# EAGLE board SkecthMiniSumo-TB6612FNG - cópia (EAGLE 9.2.2)
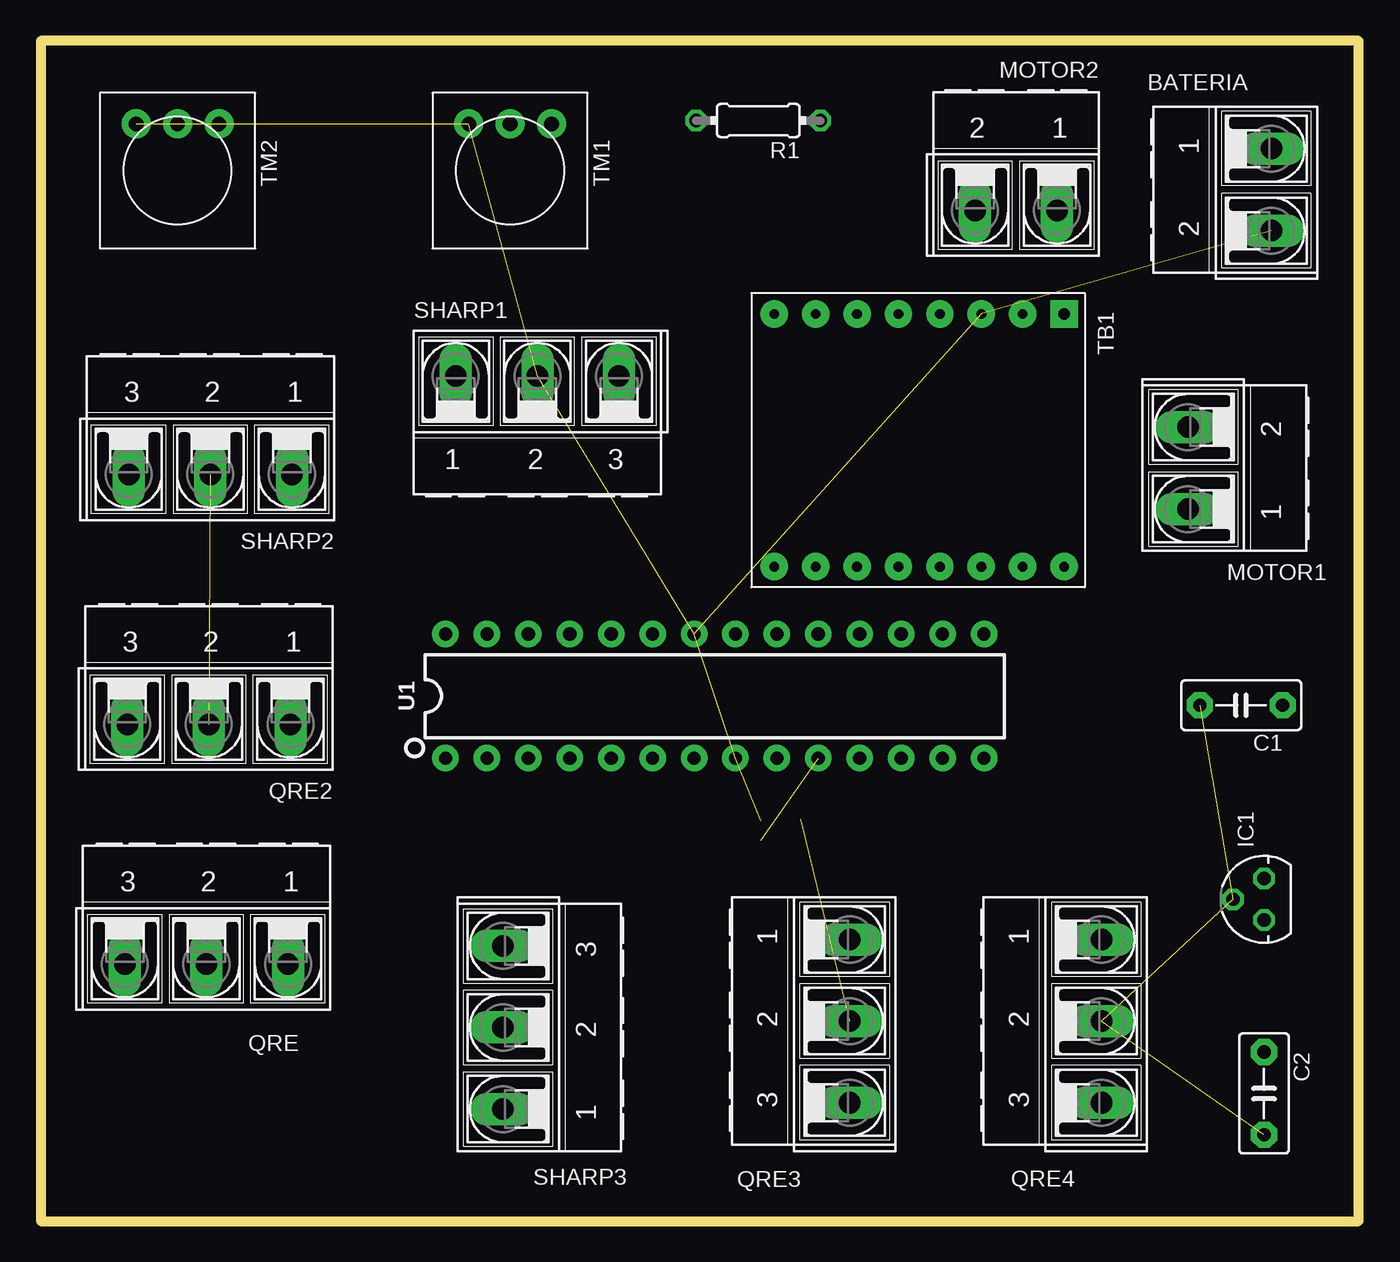
[diagram p0: board, top side]
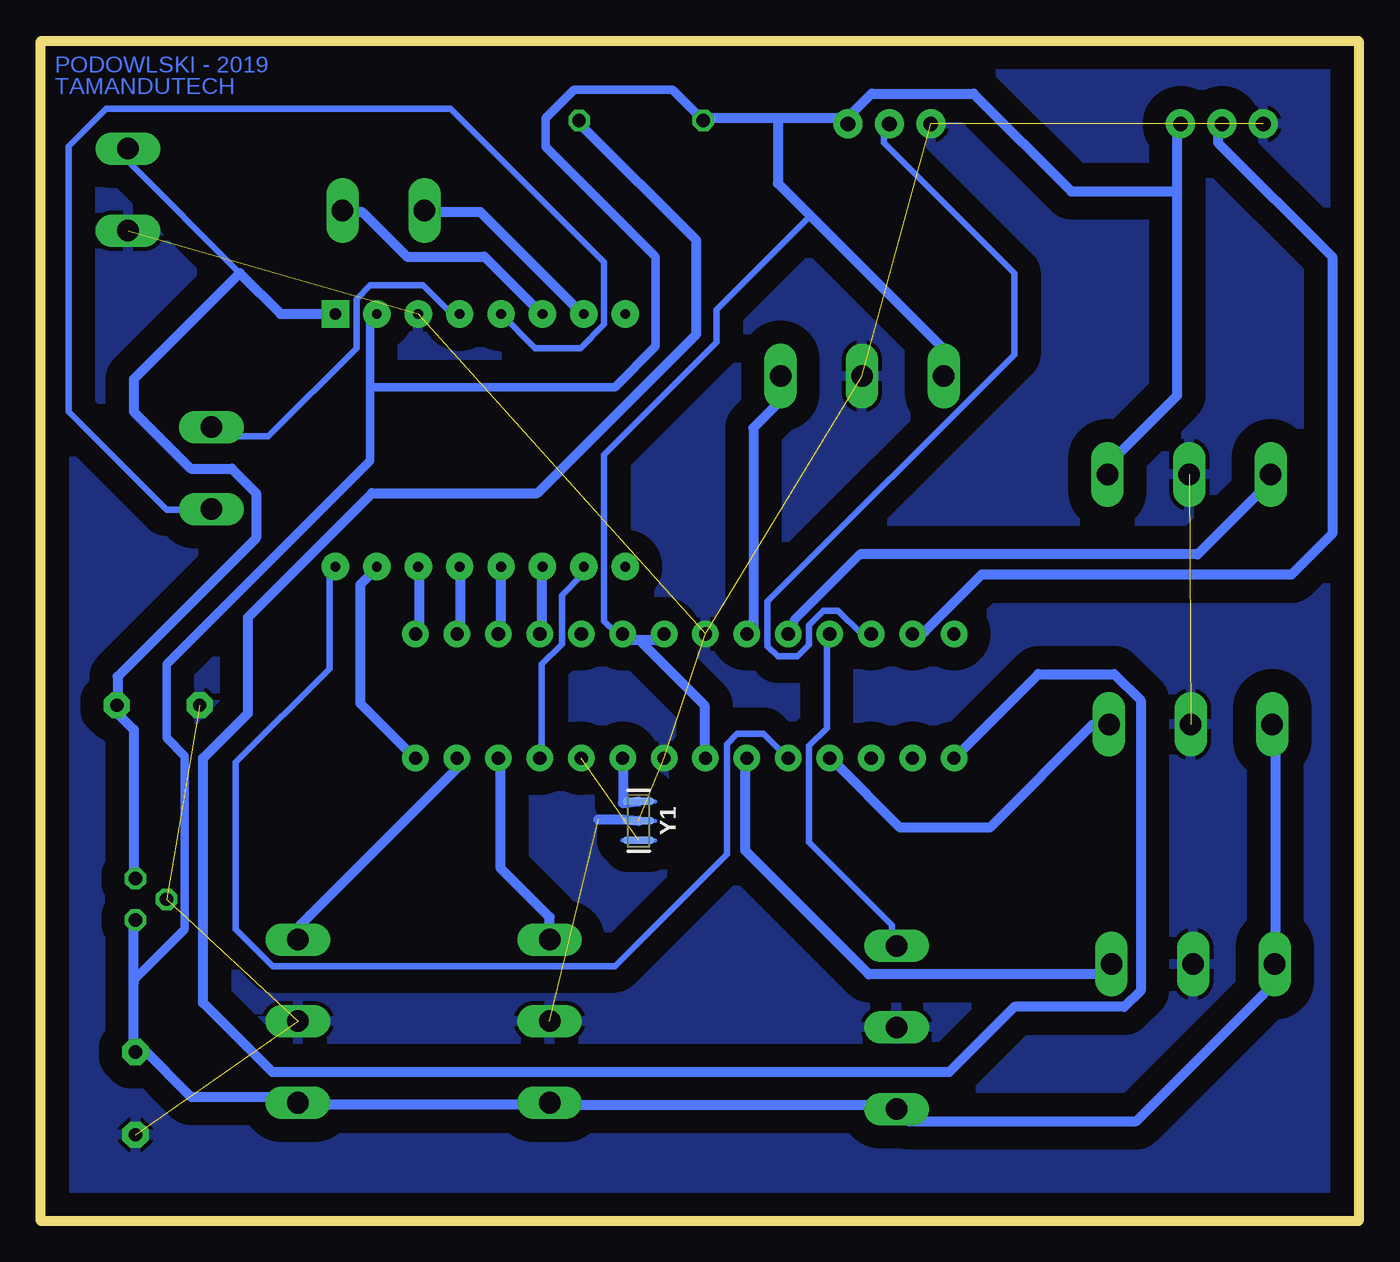
[diagram p1: board, bottom side, seen from below]

Size 80.84 x 72.37 mm. Coordinates in mm from the lower left corner, seen from the top.
Outline: 0,0 80.84,0 80.84,72.37 0,72.37 0,0
Copper layers (1*16): Top 0.035mm / dielectric 1.5mm / Bottom 0.035mm
Design rules "default": minimum track width 6mil, minimum drill 0.35mm, track to track 6mil, track to pad 6mil, pad to pad 6mil, via to via 6mil, smd to smd 6mil, copper to edge 40mil, drill to drill 6mil, minimum pad ring 10mil, minimum via ring 8mil, stop-mask expansion 4mil, vias tented up to drill 0mil, thermal gap 10mil
Net classes: 0 default: clearance 0.205 mm; 1 outer: width 0.61 mm

## Footprints (pad centres in the part's own frame; a part is rotated, then mirrored left to right if it is on the bottom)
AK500/2-H = drill 1.321 long: 1 -2.515,0; 2 2.515,0
C5B3 = drill 0.813 pad 1.6 octagon: 1 -2.54,0; 2 2.54,0
78LXX = drill 0.813 octagon: GND 0,1.905; IN 1.27,0; OUT -1.27,0
AK500/3-H = drill 1.321 long: 1 -5.004,0; 2 0,0; 3 5.004,0
0204/7 = drill 0.813 octagon: 1 -3.81,0; 2 3.81,0
TB6612FNG = drill 0.6 pad 1.676: A1 -7.62,-1.27; A2 -7.62,-3.81; AIN1 7.874,1.27; AIN2 7.874,3.81; B1 -7.62,-8.89; B2 -7.62,-6.35; BIN1 7.874,-3.81; BIN2 7.874,-6.35; GND1 -7.62,1.27; GND2 -7.62,-11.43; GND3 7.874,-11.43; PWMA 7.874,6.35; PWMB 7.874,-8.89; STBY 7.874,-1.27; VCC -7.62,3.81 | drill 0.7 pad 1.676 square: VM -7.62,6.35
TRIM-3386 = drill 0.9 pad 1.778: 1 -2.54,-2.857; 2 0,-2.857; 3 2.54,-2.857
DIP28 = drill 0.813 pad 1.626: 1 -16.51,-3.81; 2 -13.97,-3.81; 3 -11.43,-3.81; 4 -8.89,-3.81; 5 -6.35,-3.81; 6 -3.81,-3.81; 7 -1.27,-3.81; 8 1.27,-3.81; 9 3.81,-3.81; 10 6.35,-3.81; 11 8.89,-3.81; 12 11.43,-3.81; 13 13.97,-3.81; 14 16.51,-3.81; 15 16.51,3.81; 16 13.97,3.81; 17 11.43,3.81; 18 8.89,3.81; 19 6.35,3.81; 20 3.81,3.81; 21 1.27,3.81; 22 -1.27,3.81; 23 -3.81,3.81; 24 -6.35,3.81; 25 -8.89,3.81; 26 -11.43,3.81; 27 -13.97,3.81; 28 -16.51,3.81
RESONATOR-SMD-3.2X1.3 = smd 0.45 x 1.905: 1 -1.2,0; 2 0,0; 3 1.2,0

## Placement (x,y rotation side)
BATERIA  [AK500/2-H]  75.49,63.24 270 top
C1  [C5B3]  73.63,31.63 180 top
C2  [C5B3]  75.03,7.83 270 top
IC1  [78LXX]  75.03,19.73 90 top
MOTOR1  [AK500/2-H]  70.37,46.17 90 top
MOTOR2  [AK500/2-H]  59.82,61.97 180 top
QRE  [AK500/3-H]  10.16,15.76 180 top
QRE2  [AK500/3-H]  10.31,30.46 180 top
QRE3  [AK500/3-H]  49.63,12.26 270 top
QRE4  [AK500/3-H]  65.06,12.26 270 top
R1  [0204/7]  44.01,67.48 180 top
SHARP1  [AK500/3-H]  30.46,51.81 0 top
SHARP2  [AK500/3-H]  10.4,45.78 180 top
SHARP3  [AK500/3-H]  28.35,11.87 90 top
TB1  TB6612FNG  [TB6612FNG]  56.42,48 270 top
TM1  [TRIM-3386]  28.79,64.41 180 top
TM2  [TRIM-3386]  8.39,64.41 180 top
U1  328P  [DIP28]  41.34,32.19 0 top
Y1  16MHz  [RESONATOR-SMD-3.2X1.3]  44.17,24.54 270 bottom

## Library data of the parts
BATERIA MOTOR1 MOTOR2 QRE QRE2-QRE4 SHARP1-SHARP3 = con-ptr500; OC_FARNELL: unknown; OC_NEWARK: unknown
C1 C2 = capacitor-wima
IC1 = v-reg
R1 = resistor
TB1 = TB6612FNG
TM1 TM2 = adafruit
U1 = SparkFun-IC-Microcontroller; PROD_ID: IC-09136
Y1 = SparkFun-Clocks; PROD_ID: XTAL-08900

## Nets
GND: BATERIA.2 C1.2 C2.2 IC1.GND QRE2.2 QRE3.2 QRE4.2 QRE.2 SHARP1.2 SHARP2.2 SHARP3.2 TB1.GND1 TM1.3 TM2.3 U1.8 U1.22 Y1.2
N$1: U1.9 Y1.1
N$2: U1.10 Y1.3
N$3: R1.1 U1.1
N$4: TB1.AIN2 U1.14
N$5: TB1.AIN1 U1.15
N$6: MOTOR1.2 TB1.A1
N$7: MOTOR1.1 TB1.A2
N$8: MOTOR2.1 TB1.B2
N$9: MOTOR2.2 TB1.B1
N$10: TB1.PWMA U1.5
N$11: TB1.STBY U1.16
N$12: TB1.BIN1 U1.17
N$14: SHARP1.3 U1.23
N$15: SHARP2.3 U1.24
N$16: SHARP3.3 U1.25
N$17: QRE2.1 U1.4
N$18: QRE4.1 U1.13
N$19: QRE3.1 U1.12
N$20: QRE.1 U1.6
N$21: TB1.BIN2 U1.18
N$22: TB1.PWMB U1.11
N$23: TM2.2 U1.27
N$25: TM1.2 U1.26
VIN: BATERIA.1 C1.1 IC1.IN TB1.VM
VO: C2.1 IC1.OUT QRE2.3 QRE3.3 QRE4.3 QRE.3 R1.2 SHARP1.1 SHARP2.1 SHARP3.1 TB1.VCC TM1.1 TM2.1 U1.7 U1.20 U1.21

## Tracks (layer width: path | path; a pad name or v marks a point on that pad's centre or on a via)
GND  (12 unrouted)
  Bottom 0.61: 46.63,24.63 45.13,24.63 Y1.2
  pour Bottom (isolate 1.422): -0.57,72.23 -0.57,0.13 0.13,-0.57 79.93,-0.57 80.63,0.13 80.63,72.23
N$1
  Bottom 0.61: Y1.1 45.13,25.63 45.13,28.13 U1.9
N$2  (1 unrouted)
N$3
  Bottom 0.61: R1.1 47.63,67.13 40.63,60.13 40.63,54.38 50.38,44.63 60.52,44.63 68.13,37.02 68.13,31.13 70.88,28.38 70.88,13.38 66.63,9.13 25.13,9.13 21.13,13.13 14.38,13.13 13.38,14.13 13.38,31.92 15,33.54 19.65,33.54 24.74,28.45 24.8,28.38 U1.1
N$4
  Bottom 0.61: U1.14 58.13,28.63 61.24,31.74 61.24,39.02 60.63,39.63 TB1.AIN2
N$5
  Bottom 0.61: U1.15 57.63,36.13 57.63,39.63 TB1.AIN1
N$6
  Bottom 0.406: 55.63,55.63 57.38,57.38 60.63,57.38 61.48,56.53 61.48,53.53 66.88,48.13 69.63,48.13 70.13,48.63 MOTOR1.2
  Bottom 0.61: 55.63,55.63 TB1.A1
N$7
  Bottom 0.406: TB1.A2 50.53,53.53 47.73,53.53 46.28,54.98 46.28,58.78 55.7,68.2 76.83,68.2 79.13,65.9 79.13,49.63 73.13,43.63 70.63,43.63 MOTOR1.1
N$8
  Bottom 0.61: MOTOR2.1 62.25,61.88 61.13,61.88 58.38,59.13 53.63,59.13 50.13,55.63 TB1.B2
N$9
  Bottom 0.61: MOTOR2.2 57.22,61.88 53.88,61.88 47.63,55.63 TB1.B1
N$10
  Bottom 0.406: U1.5 35.01,28.42 35.04,28.42 36.5,29.88 38.13,29.88 38.76,29.25 38.76,22.5 45.63,15.63 66.63,15.63 68.88,17.88 68.88,28.13 63.13,33.88 63.13,39.63 TB1.PWMA
N$11
  Bottom 0.61: U1.16 55.13,36.13 55.13,39.63 TB1.STBY
N$12
  Bottom 0.61: U1.17 52.63,36.13 52.63,39.63 TB1.BIN1
N$14
  Bottom 0.61: U1.23 37.13,36.13 37.13,48.63 35.63,50.13 35.63,51.63 SHARP1.3
N$15
  Bottom 0.508: 30.59,40.88 34.63,36.84 34.63,36.13 U1.24
  Bottom 0.61: 30.59,40.88 9.88,40.88 5.13,45.63 SHARP2.3
N$16
  Bottom 0.406: U1.25 32.63,35.63 32.63,30.22 33.72,29.13 33.72,23.22 28.63,18.13 28.63,17.13 SHARP3.3
N$17
  Bottom 0.61: QRE2.1 16.3,30.46 22.63,24.13 28.13,24.13 32.13,28.13 U1.4
N$18
  Bottom 0.61: U1.13 55.31,27.76 64.35,18.72 65.06,18.01 QRE4.1
N$19
  Bottom 0.61: QRE3.1 49.63,18.63 52.63,21.63 52.63,28.13 U1.12
N$20
  Bottom 0.61: U1.6 37.63,28.13 37.63,22.71 30.05,15.13 15.63,15.13 15.13,15.63 QRE.1
N$21
  Bottom 0.61: U1.18 50.13,36.13 50.13,39.63 TB1.BIN2
N$22
  Bottom 0.406: 47.63,39.63 48.88,38.38 48.88,35.38 50.13,34.13 50.13,28.63 U1.11
  Bottom 0.61: 47.63,39.63 TB1.PWMB
N$23
  Bottom 0.61: U1.27 27.13,36.13 26.63,36.13 23.13,39.63 4.13,39.63 1.63,42.13 1.63,59.13 8.63,66.13 8.63,67.13 TM2.2
N$25
  Bottom 0.406: U1.26 29.93,36.01 30.51,36.01 31.93,37.43 32.83,37.43 33.72,36.54 33.72,35.33 34.42,34.63 35.63,34.63 36.26,35.26 36.26,38 21.13,53.13 21.13,58.13 29.13,66.13 29.13,67.13 TM1.2
VIN
  Bottom 0.406: 68.63,58.13 75.49,64.99 BATERIA.1
  Bottom 0.61: IC1.IN 75.13,21.13 75.13,30.13 76.63,31.63 C1.1 76.13,31.63 76.13,33.38 67.63,41.88 67.63,44.63 69.13,46.13 71.63,46.13 75.13,49.63 75.13,51.63 68.63,58.13 66.13,55.63 63.13,55.63 TB1.VM
VO
  Bottom 0.406: 33.63,61.63 39.38,55.88 39.38,53.88 46.28,46.98 46.28,36.78 45.63,36.13 U1.20
  Bottom 0.508: 60.63,51.13 60.63,46.63 73.13,34.13 73.13,29.63 72.01,28.51 72.01,17.88 75.13,14.76 75.13,14.63 | 60.63,51.13 60.63,55.13 TB1.VCC | 60.63,51.13 45.63,51.13 43.13,53.63 43.13,59.13 49.88,65.88 49.88,67.63 48.13,69.38 42.1,69.38 R1.2 | 74.93,18.46 IC1.OUT 74.76,18.46
  Bottom 0.61: 11.13,63.13 11.13,50.63 15.63,46.13 SHARP2.1 | 11.13,63.13 11.13,67.13 TM2.1 | 44.13,35.63 40.13,31.63 40.13,28.63 U1.7 | 44.13,35.63 45.13,35.63 U1.20 | 44.13,35.63 42.63,35.63 U1.21 | 35.63,67.63 31.63,67.63 TM1.1 31.33,67.68 29.88,69.13 23.63,69.13 17.63,63.13 11.13,63.13 | 35.63,67.63 40.13,67.63 R1.2 | 35.63,67.63 35.63,63.63 33.63,61.63 25.63,53.63 25.63,52.13 SHARP1.1 | IC1.OUT 75.13,18.13 75.13,14.63 75.13,10.63 C2.1 74.63,10.63 71.63,7.63 65.13,7.63 QRE4.3 64.63,7.13 49.63,7.13 | QRE2.3 5.13,30.13 5.13,16.13 QRE.3 5.63,15.63 5.63,14.13 13.63,6.13 27.63,6.13 28.13,6.63 SHARP3.1 28.63,7.13 49.63,7.13 | 49.63,7.13 QRE3.3

## Text on the board
Bottom: PODOWLSKI - 2019 | TAMANDUTECH